# Altium PCB 电子脚铐本体主控板V4.PcbDoc
Units mil, origin at the board's own origin, x right, y up, seen from the top; angles counter-clockwise.
Board outline 787.4 x 1968.51 mil, 2 copper layers (Top Layer, Bottom Layer), stack 42.17 mil thick; 69 components, 45 nets, 207 pads, 0 vias.
Unrouted connection lines stored in the file: 136.
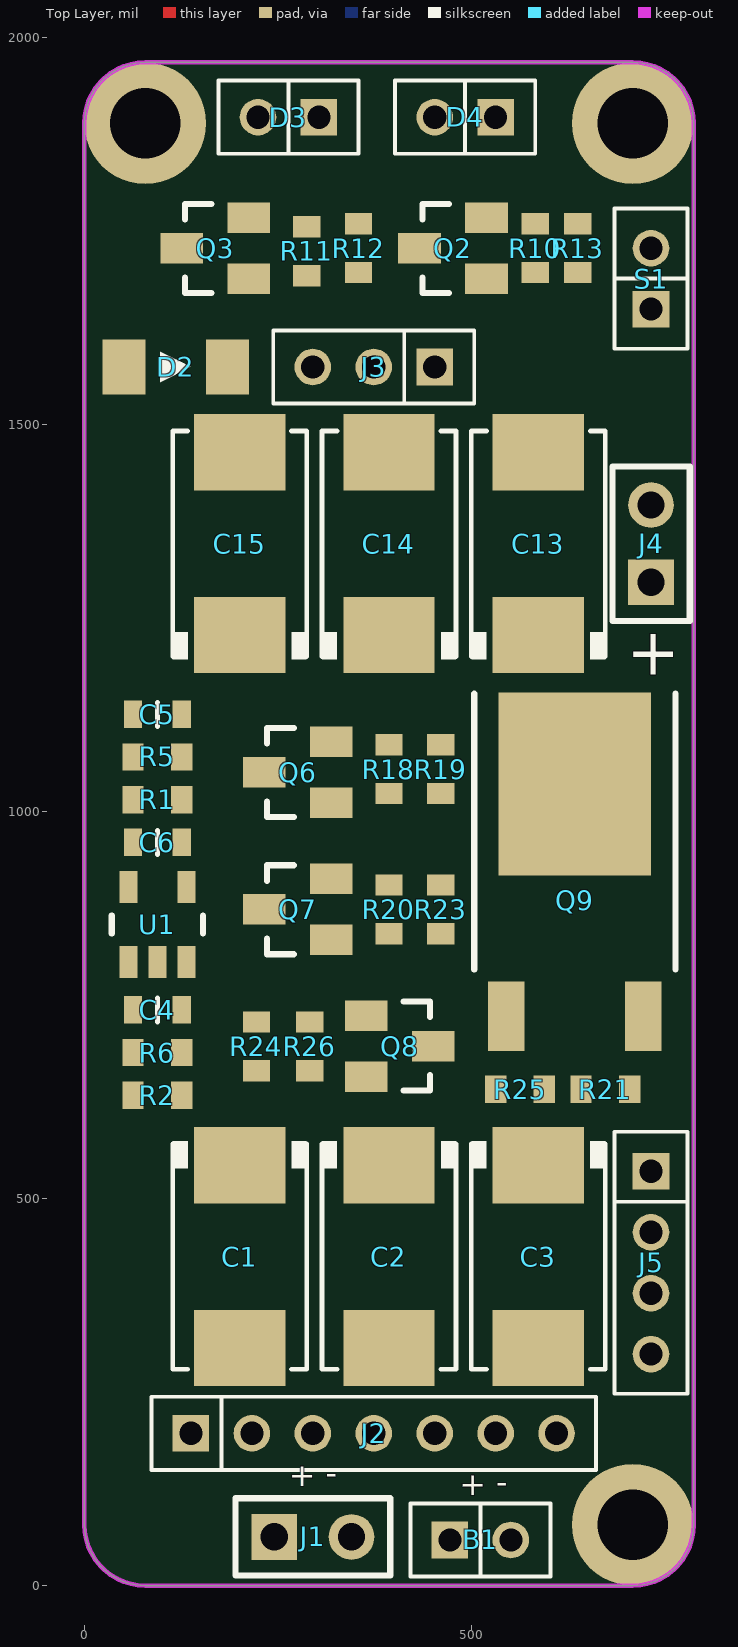
[diagram p0: Top Layer view]
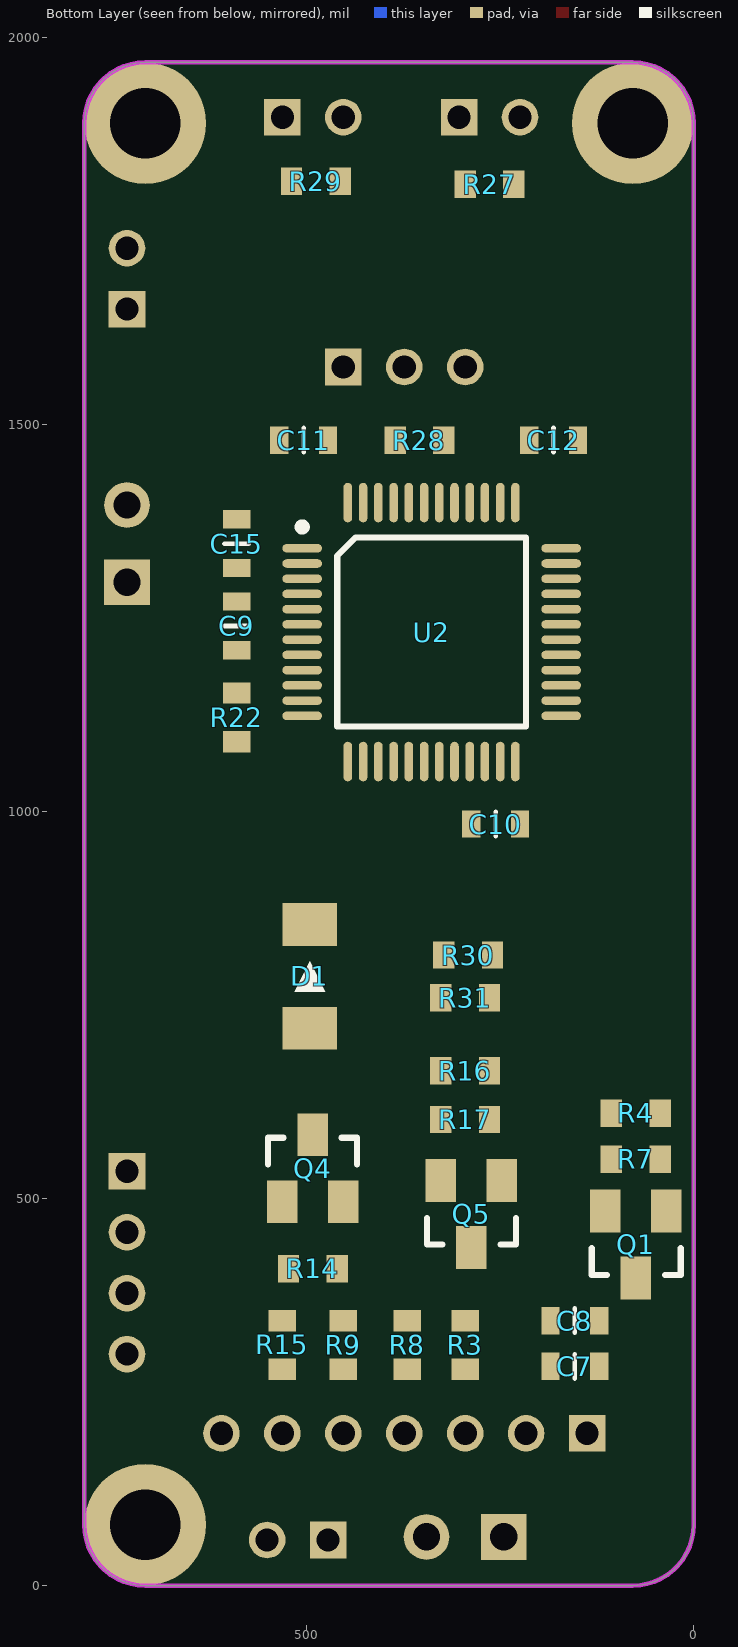
[diagram p1: Bottom Layer view, seen from below]

## Layer stack, top to bottom
Top Solder: solder mask 0.4, Solder Resist, Dk 3.5
Top Layer: signal copper 1.4
Dielectric 1: dielectric 39.3701, FR-4, Dk 4.8
Bottom Layer: signal copper 1.4
Bottom Solder: solder mask 0.4, Solder Resist, Dk 3.5

## Board outline
0,78.74 ccw(c78.74,78.74) 78.74,0 708.66,0 ccw(c708.66,78.74) 787.4,78.74 787.4,1889.77 ccw(c708.66,1889.77) 708.66,1968.51 78.74,1968.51 ccw(c78.74,1889.77) 0,1889.77

## Design rules (kind name [scope] priority, off if disabled: settings)
Clearance [All] p1: gap=6
ComponentClearance [All] p1: gap=0 collisioncheckmode=3 verticalgap=0 showdistances=FALSE
Height [All] p1: minheight=0 maxheight=2000 prefheight=500
HoleSize [All] p1: absolutevalues=TRUE maxlimit=200 minlimit=1 maxpercent=80.000 minpercent=20.000
HoleToHoleClearance [All] p1: gap=6 allowstackedmicrovias=TRUE
MinimumSolderMaskSliver [All] p1: minsoldermaskwidth=0
PlaneConnect [All] p1: planeconnectstyle=Direct reliefexpansion=20 reliefentries=4 reliefconductorwidth=10 reliefairgap=10
PolygonConnect [All] p1: connectstyle=Direct reliefconductorwidth=10 reliefentries=4 polygonreliefangle="90 Angle" airgapwidth=10
RoutingVias [All] p1: holewidth=28 width=50 viastyle="Through Hole" minholewidth=8 minwidth=12 maxholewidth=200 maxwidth=300
SilkToSilkClearance [All] p1: silktosilkclearance=0
SilkToSolderMaskClearance [IsPad] p1: minsilkscreentomaskgap=0 clearancetoexposedcopper=TRUE
SolderMaskExpansion [All] p1: expansion=4
Width [All] p1: maxlimit=157.48 minlimit=10 preferedwidth=10
21 further rules are at their usual default settings.

## Components (designator, comment, footprint, x,y, rotation, side; value= is the part's Value field where it differs from the comment)
B1 "beep" Jk1*2-2.0 511.81,59.06 r0 top
C1 "210uF/16V" C7343 200.79,425.2 r270 top
C2 "210uF/16V" C7343 393.7,425.2 r270 top
C3 "210uF/16V" C7343 586.61,425.2 r270 top
C4 "0.1uF" C0603 94.49,744.09 r0 top
C5 "10uF" C0603 94.49,1125.98 r0 top
C6 "470pF" C0603 94.49,960.63 r180 top
C7 "10uF" C0603 153.54,283.46 r180 bottom
C8 "0.1uF" C0603 153.54,342.52 r180 bottom
C9 "0.1uF" C0603 590.55,1240.16 r90 bottom
C10 "0.1uF" C0603 255.91,984.25 r0 bottom
C11 "0.1uF" C0603 503.94,1480.31 r180 bottom
C12 "0.1uF" C0603 181.1,1480.31 r0 bottom
C13 "210uF/16V" C7343 586.61,1346.46 r90 top
C14 "210uF/16V" C7343 393.7,1346.46 r90 top
C15 "210uF/16V" C7343 200.79,1346.46 r90 top
C15 "0.1uF" C0603 590.55,1346.46 r270 bottom
D1 "1N4148" SOD-80-S 496.06,787.4 r90 bottom
D2 "1N4148" SOD-80-S 118.11,1574.8 r0 top
D3 "LED" Jk1*2-2.0 263.78,1897.64 r180 top
D4 "LED" Jk1*2-2.0 492.13,1897.64 r180 top
J1 "Jack 1x2" HDR1X2 295.28,62.99 r0 top
J2 "Jack 1x7" Jk1*7-2.0 374.02,196.85 r0 top
J3 "Jack 1x3" Jk1*3-2.0 374.02,1574.8 r180 top
J4 "Jack 1x2" HDR1X2 732.28,1346.46 r90 top
J5 "SHD1X4-2.00" Jk1*4-2.0 732.28,417.32 r270 top
Q1 "S8050" SOT-23 74.8,440.94 r0 bottom
Q2 "S8050" SOT-23 476.38,1728.35 r90 top
Q3 "S8550" SOT-23 169.29,1728.35 r90 top
Q4 "S8550" SOT-23 492.13,539.37 r180 bottom
Q5 "S8050" SOT-23 287.4,480.31 r0 bottom
Q6 "S8550" SOT-23 275.59,1051.18 r90 top
Q7 "S8550" SOT-23 275.59,874.02 r90 top
Q8 "S8050" SOT-23 407.48,696.85 r270 top
Q9 "2SA1615" TO-252 633.86,885.83 r0 top
R1 "100K" R0603 94.49,1015.75 r0 top
R2 "200K" R0603 94.49,633.86 r180 top
R3 "200K" R0603 295.28,311.02 r90 bottom
R4 "20K" R0603 74.8,610.24 r180 bottom
R5 "160K" R0603 94.49,1070.87 r180 top
R6 "100K" R0603 94.49,688.98 r180 top
R7 "10K" R0603 74.8,551.18 r180 bottom
R8 "10R" R0603 370.08,311.02 r90 bottom
R9 "10R" R0603 452.76,311.02 r90 bottom
R10 "20K" R0603 582.68,1728.35 r270 top
R11 "200K" R0603 287.4,1724.41 r270 top
R12 "100K" R0603 354.33,1728.35 r90 top
R13 "10K" R0603 637.8,1728.35 r270 top
R14 "200K" R0603 492.13,409.45 r180 bottom
R15 "100k" R0603 531.5,311.02 r90 bottom
R16 "20K" R0603 295.28,665.35 r0 bottom
R17 "10K" R0603 295.28,602.36 r0 bottom
R18 "200K" R0603 393.7,1055.12 r90 top
R19 "100K" R0603 460.63,1055.12 r90 top
R20 "200K" R0603 393.7,874.02 r90 top
R21 "200K" R0603 673.23,641.73 r180 top
R22 "200K" R0603 590.55,1122.05 r90 bottom
R23 "100K" R0603 460.63,874.02 r90 top
R24 "20K" R0603 222.44,696.85 r270 top
R25 "1K" R0603 562.99,641.73 r0 top
R26 "10K" R0603 291.34,696.85 r90 top
R27 "1K" R0603 263.78,1811.02 r180 bottom
R28 "100K" R0603 354.33,1480.31 r180 bottom
R29 "1K" R0603 488.19,1814.96 r0 bottom
R30 "NC" R0603 291.34,814.96 r180 bottom
R31 "NC" R0603 295.28,759.84 r180 bottom
S1 "Switch" Jk1*2-2.0 732.28,1688.98 r90 top
U1 "MIC5219YM5" SOT-23-5 94.49,854.33 r90 top
U2 "STM32F103CB" LQFP48 338.58,1232.28 r180 bottom

## Footprints (in the part's own frame and the unit in brackets; to place one, negate y for a bottom-side part, rotate by r counter-clockwise, add the part's x,y. Pads: shape width x height; smd on the part's side, far side on the other; paste and mask are expansions set on the pad)
C0603 [mm]
  rect 0.6x0.9 smd: 1(-0.8,0) 2(0.8,0)
  silkscreen extent 0,-0.4 0,0.4, body extent -0.8,-0.4 0.8,0.4, height 0.5
C7343 [mm] "100uF/25V"
  rect 2.5x3 smd: 1(-3,0) 2(3,0)
  silkscreen extent -3.8,-2.2 3.7,2.2, body extent -3.87,-2.15 3.87,2.15, height 2.9
HDR1X2 [mm] "Connector; Header; 2 Position"
  rect 1.5x1.5 hole 0.9: 1(-1.27,0)
  round 1.5 hole 0.9: 2(1.27,0)
  silkscreen extent -2.54,-1.27 2.54,1.27
Jk1*2-2.0 [mm]
  rect 1.2x1.2 hole 0.762: 1(-1,0)
  round 1.2 hole 0.762: 2(1,0)
  silkscreen extent -2.3,-1.2 2.3,1.2
Jk1*3-2.0 [mm]
  rect 1.2x1.2 hole 0.762: 1(-2,0)
  round 1.2 hole 0.762: 2(0,0) 3(2,0)
  silkscreen extent -3.3,-1.2 3.3,1.2
Jk1*4-2.0 [mm] "4P，直插，2.0mm间距，排母"
  rect 1.2x1.2 hole 0.762: 1(-3,0)
  round 1.2 hole 0.762: 2(-1,0) 3(1,0) 4(3,0)
  silkscreen extent -4.3,-1.2 4.3,1.2, body extent -4.25,-1.22 4.25,1.18, height 4.3
Jk1*7-2.0 [mm]
  rect 1.2x1.2 hole 0.762: 1(-6,0)
  round 1.2 hole 0.762: 2(-4,0) 3(-2,0) 4(0,0) 5(2,0) 6(4,0) 7(6,0)
  silkscreen extent -7.3,-1.2 7.3,1.2
LQFP48 [mm]
  oval 1.3x0.28 smd: 1(-4.25,2.75) 2(-4.25,2.25) 3(-4.25,1.75) 4(-4.25,1.25) 5(-4.25,0.75) 6(-4.25,0.25) 7(-4.25,-0.25) 8(-4.25,-0.75) 9(-4.25,-1.25) 10(-4.25,-1.75) 11(-4.25,-2.25) 12(-4.25,-2.75) 25(4.25,-2.75) 26(4.25,-2.25) 27(4.25,-1.75) 28(4.25,-1.25) 29(4.25,-0.75) 30(4.25,-0.25) 31(4.25,0.25) 32(4.25,0.75) 33(4.25,1.25) 34(4.25,1.75) 35(4.25,2.25) 36(4.25,2.75)
  oval 0.28x1.3 smd: 13(-2.75,-4.25) 14(-2.25,-4.25) 15(-1.75,-4.25) 16(-1.25,-4.25) 17(-0.75,-4.25) 18(-0.25,-4.25) 19(0.25,-4.25) 20(0.75,-4.25) 21(1.25,-4.25) 22(1.75,-4.25) 23(2.25,-4.25) 24(2.75,-4.25) 37(2.75,4.25) 38(2.25,4.25) 39(1.75,4.25) 40(1.25,4.25) 41(0.75,4.25) 42(0.25,4.25) 43(-0.25,4.25) 44(-0.75,4.25) 45(-1.25,4.25) 46(-1.75,4.25) 47(-2.25,4.25) 48(-2.75,4.25)
  silkscreen extent -4.38,-3.1 3.1,3.57, body extent -4.49,-4.5 4.51,4.5, height 1.8
R0603 [mm]
  rect 0.7x0.9 smd: 1(-0.8,0) 2(0.8,0)
  body extent -0.8,-0.4 0.8,0.4, height 0.37
SOD-80-S [mm]
  rect 1.4x1.8 smd: 1(-1.7,0) 2(1.7,0)
  silkscreen extent -0.5,-0.5 0.5,0.5, body extent -1.85,-0.79 1.85,0.81, height 1.6
SOT-23 [mm]
  rect 1x1.4 smd: 1(-1,-1.1) 2(1,-1.1) 3(0,1.1)
  silkscreen extent -1.47,0.13 1.45,1, body extent -1.45,-1.4 1.45,1.4, height 1.3
SOT-23-5 [mm]
  rect 1.05x0.6 smd: 1(-1.225,0.95) 2(-1.225,0) 3(-1.225,-0.95) 4(1.225,-0.95) 5(1.225,0.95)
  silkscreen extent -0.3,-1.5 0.3,1.5, body extent -1.5,-1.5 1.5,1.5, height 1.2
TO-252 [mm]
  rect 1.2x2.28 smd: 1(-2.25,-3.816) 3(2.25,-3.816)
  rect 5x6 smd: 2(0,3.816)
  silkscreen extent -3.3,-2.27 3.3,6.78, body extent -3.25,-3.62 3.25,5.68, height 2.3

## Part data
B1: library part Speaker, "Loudspeaker"
C1 C2 C3 C13 C14 C15: library part "Cap Poll"
C4 C9 C10 C11 C12 C15: library part "Cap Semi"
C5 C6 C7 C8: library part CAP, "CAP"
D1 D2: library part DIODE-SWITCHING, "Silicon Epitaxial Planar Diodes"
J1 J2 J3 J4: "插座"
J5: library part HEADER1X4
Q1 Q2 Q5 Q8: "NPN triode, 0.5A Max"
Q3 Q4 Q6 Q7: "PNP triode"
Q9: library part MJD122
R1 R2 R5 R6 R27 R28 R29 R30 R31: library part Res
R3 R4 R7 R8 R9 R10 R11 R12 R13 R14 R15 R16 R17 R18 R19 R20 R21 R22 R23 R24 R25 R26: library part RES, "Resistor"
S1: library part Sw
U1: library part MIC5205
U2: library part STM32F103Cx

## Free pads (board coordinates)
  round 157.48 hole 90.55: ""(78.74,1889.77) ""(708.66,78.74) ""(708.66,1889.77)

## Nets (pads, with @x,y where several pads share a name; then routed paths per layer and width w, separated by ;. In a path a pad name is that pad's centre, name@x,y a point inside that pad or via, vN(x,y) a via of type N, cw(c..) or ccw(c..) an arc to the next point about the centre after c; other vN are vias at no path point)
+3.3V: C5.1 C7.1 C8.1 C9.1 C10.1 C11.1 C12.1 J2.2 J5.1 Q3.2 Q4.2 Q6.2 R1.1 R3.2 R10.1 R11.1 R14.2 R18.2 R27.1 R29.1 U1.5 U2.1 U2.9 U2.24 U2.36 U2.48
ADDECCUT: Q2.1 R10.2 R13.2 S1.2 U2.13
ADPOW: R2.2 R6.1 U2.14
BAT: B1.1 C1.1 C2.1 C3.1 C4.2 J1.1 Q9.3 R2.1 R21.1 U1.1 U1.3
BOOT0: R28.1 U2.44
CTRBEEP: R4.1 U2.33
CTRSHOCK: R23.2 U2.11
CTRSHOCKPOW: R19.2 U2.12
DECCUT: D2.1 Q3.3 U2.32
GND: C1.2 C2.2 C3.2 C4.1 C5.2 C6.2 C7.2 C8.2 C9.2 C10.2 C11.2 C12.2 C13.2 C14.2 C15.2 J1.2 J2.1 J3.1 J3.3 J4.2 J5.3 Q1.2 Q2.2 Q5.2 Q8.2 R5.2 R6.2 R7.1 R13.1 R17.2 R22.2 R26.1 R28.2 S1.1 U1.2 U2.8 U2.23 U2.35 U2.47
LEDBLUE: D4.2 U2.15
LEDRED: D3.2 U2.16
NetB1_2: B1.2 Q1.3
NetC6_1: C6.1 R1.2 R5.1 U1.4
NetC13_1: C13.1 C14.1 C15.1@200.79,1228.35 J4.1 Q9.2
NetD3_1: D3.1 R27.2
NetD4_1: D4.1 R29.2
NetQ1_1: Q1.1 R4.2 R7.2
NetQ2_3: Q2.3 R12.2
NetQ3_1: Q3.1 R11.2 R12.1
NetQ4_1: Q4.1 R14.1 R15.1
NetQ5_1: Q5.1 R16.1 R17.1
NetQ6_1: Q6.1 R18.1 R19.1
NetQ6_3: Q6.3 Q7.2 R20.2
NetQ7_1: Q7.1 R20.1 R23.1
NetQ7_3: Q7.3 R24.2
NetQ8_1: Q8.1 R24.1 R26.2
NetQ8_3: Q8.3 R21.2 R25.2
NetQ9_1: Q9.1 R25.1
NRST: C15.1@590.55,1377.95 U2.7
SPARE1: R30.2 U2.21
SPARE2: R31.2 U2.22
SWCLK: J5.2 U2.37
SWDIO: J5.4 U2.34
TTL1_RX: R9.2 U2.31
TTL1_TX: R8.2 U2.30
WAKEUP: D1.2 D2.2 R22.1 U2.10
XTAL: U2.5
YL_AUOUT: D1.1 Q4.3
YL_AUX: J2.6 R15.2
YL_EN: R16.2 U2.17
YL_ENOUT: J2.3 Q5.3 R3.1
YL_RX: J2.4 R8.1
YL_SET: U2.29
YL_TX: J2.5 R9.1
pads on no net: J2.7 J3.2 R30.1 R31.1 U2.2 U2.3 U2.4 U2.6 U2.18 U2.19 U2.20 U2.25 U2.26 U2.27 U2.28 U2.38 U2.39 U2.40 U2.41 U2.42 U2.43 U2.45 U2.46

## Keep-outs
Keep-Out Layer:
  the board outline again, w6

## Silkscreen, mask and mechanical layers (free items; w line width, h text height)
Top Overlay:
  text "+" at 700.79,1177.17 h60
  text "- +" at 326.77,153.54 h30 r180
  text "- +" at 547.24,141.73 h30 r180